# Altium PCB LedTutorial.PcbDoc
Units mm, origin at the board's own origin, x right, y up, seen from the top; angles counter-clockwise.
Board outline 20 x 20 mm, 2 copper layers (Top Layer, Bottom Layer), stack 1.671 mm thick; 3 components, 2 nets, 6 pads, 0 vias.
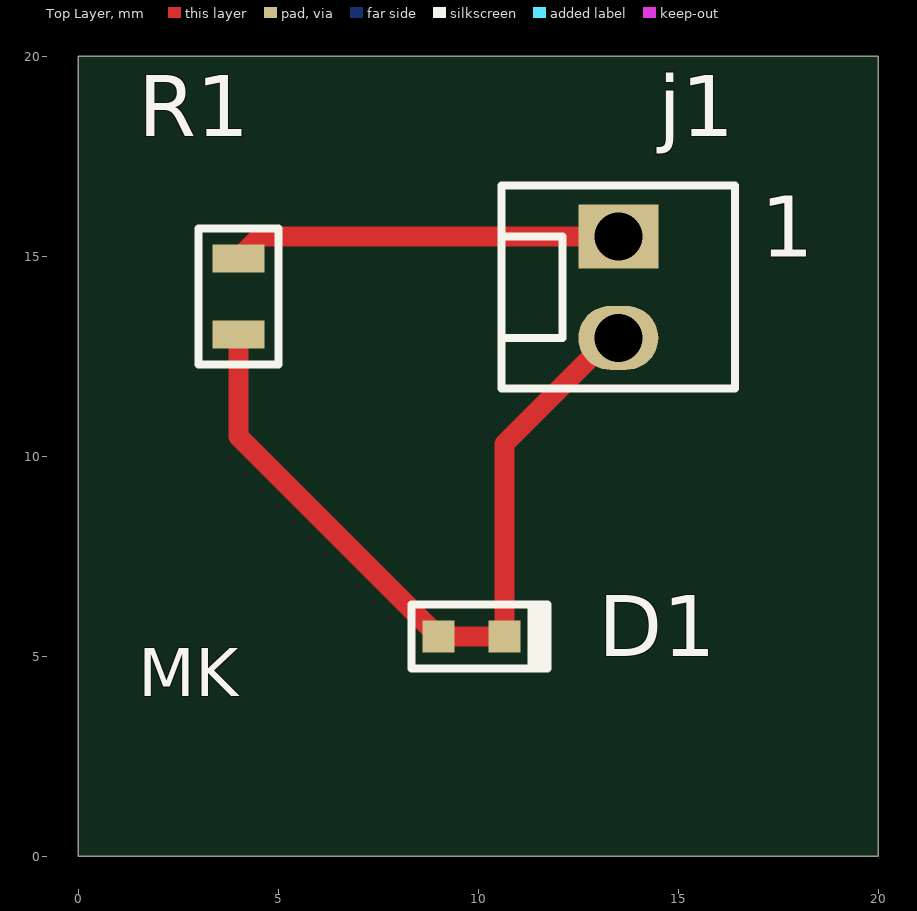
[diagram p0: Top Layer view]
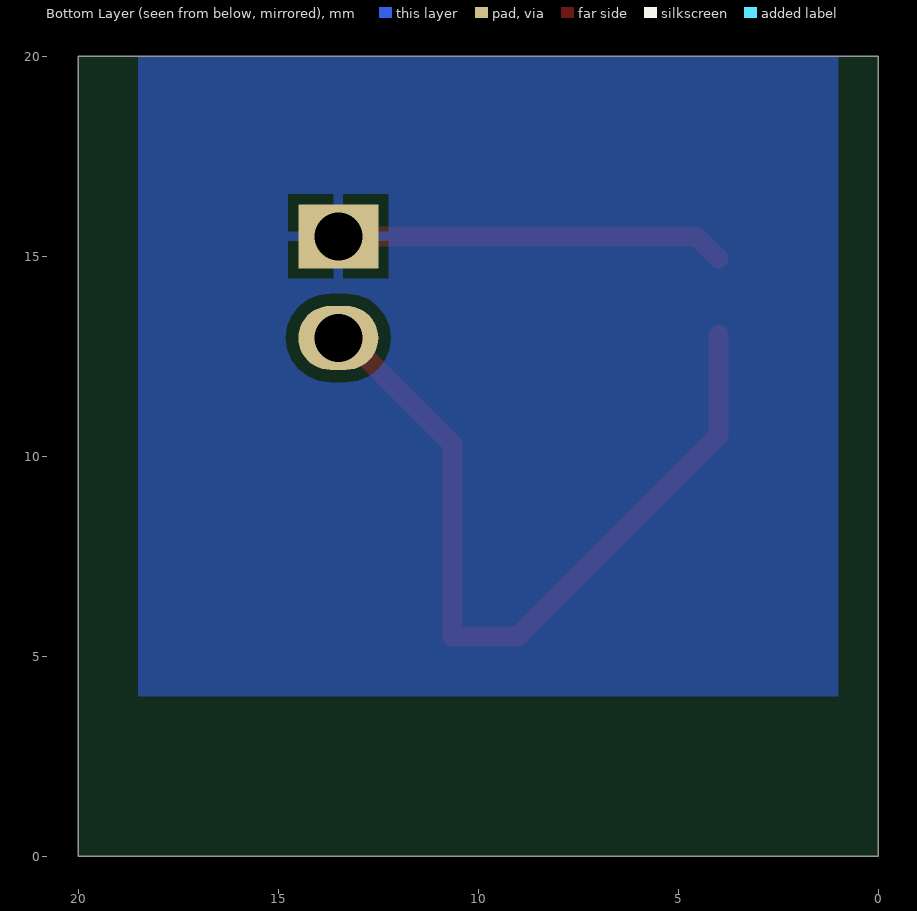
[diagram p1: Bottom Layer view, seen from below]
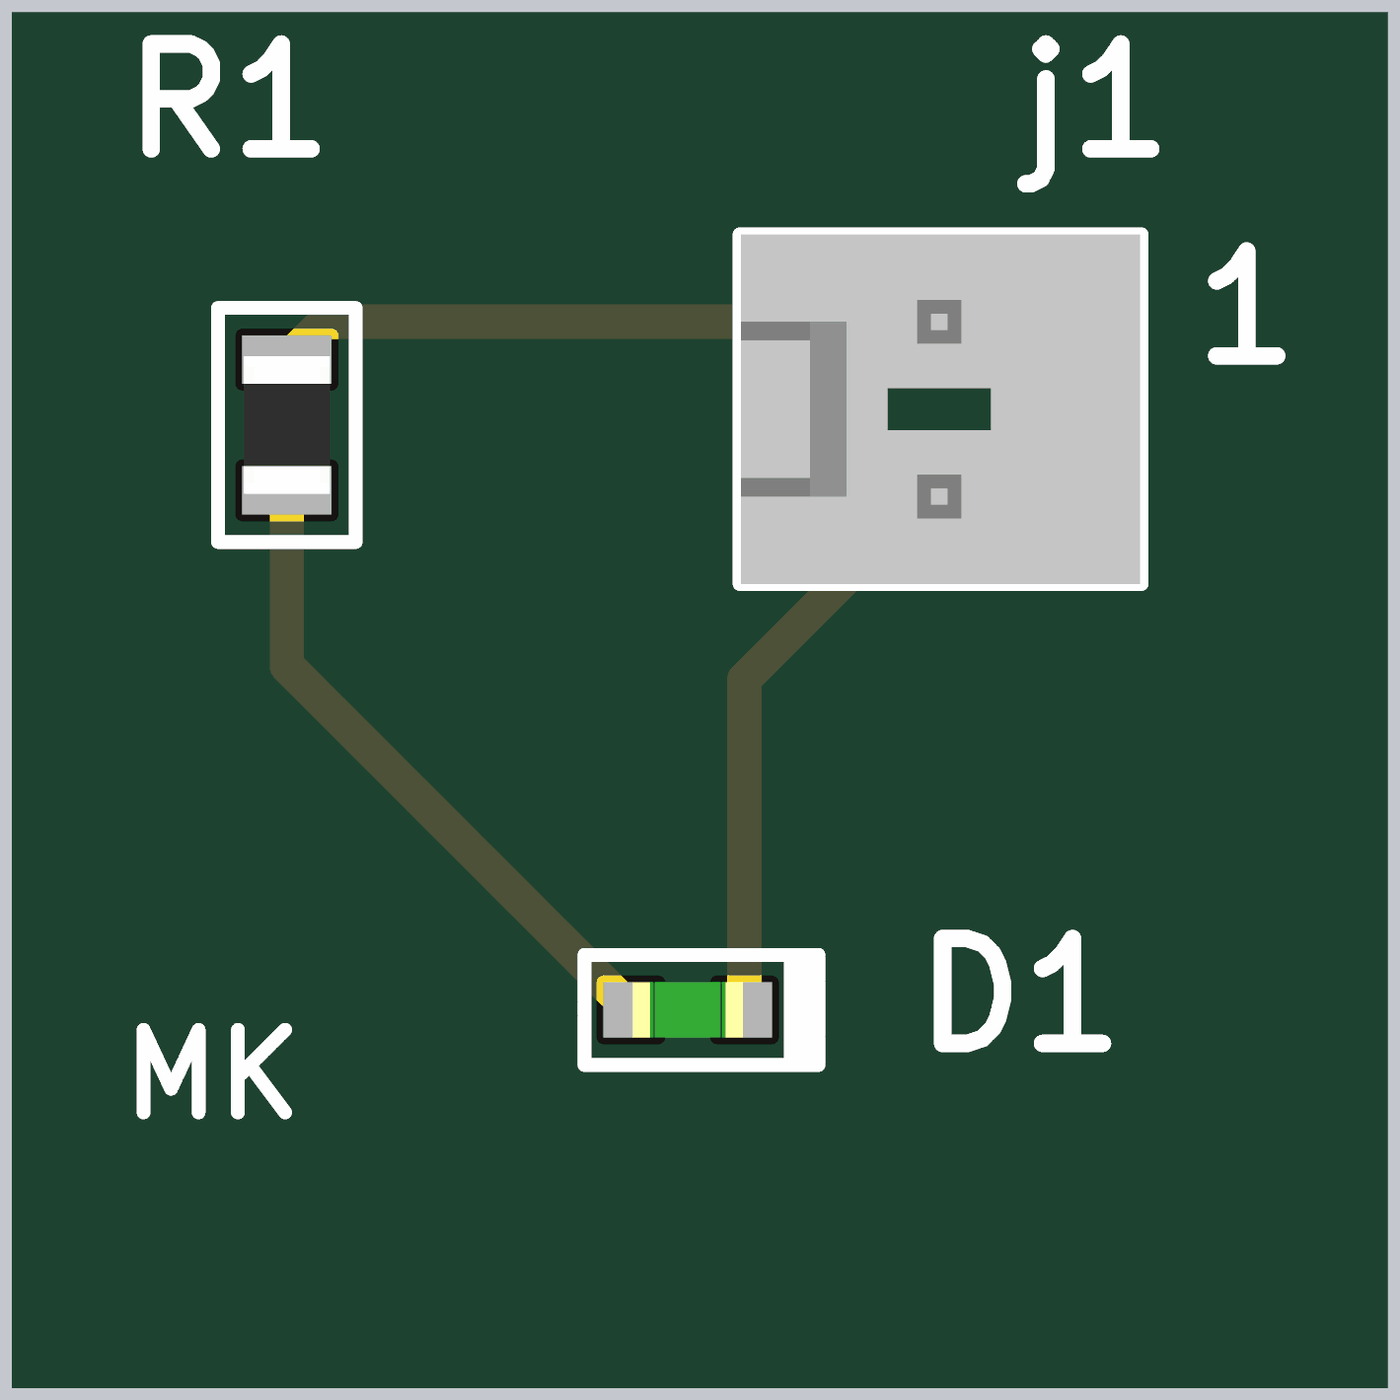
[diagram p2: 3D render of the assembled board from above, using the file's embedded part models]

## Layer stack, top to bottom
Top Solder: solder mask 0.0102, Solder Resist, Dk 3.5
Top Layer: signal copper 0.0356
Dielectric 1: dielectric 1.6, FR-4, Dk 4.8
Bottom Layer: signal copper 0.0356
Bottom Solder: solder mask 0.0102, Solder Resist, Dk 3.5

## Board outline
20,20 20,0 0,0 0,20

## Design rules (kind name [scope] priority, off if disabled: settings)
Clearance [All] p1: gap=0.3 ignorepadtopadclearanceinfootprint=FALSE
PolygonConnect [All] p1: connectstyle=Relief reliefconductorwidth=0.254 reliefentries=4 polygonreliefangle="90 Angle" airgapwidth=0.254
RoutingVias [All] p1: holewidth=0.3 width=0.6 viastyle="Through Hole" minholewidth=0.3 minwidth=0.6 maxholewidth=0.3 maxwidth=0.6
SolderMaskExpansion [All] p1: expansion=0.102
Width [All] p1: maxlimit=1 minlimit=0.3 preferedwidth=0.5
30 further rules are at their usual default settings.

## Components (designator, comment, footprint, x,y, rotation, side; value= is the part's Value field where it differs from the comment)
D1 "Green" LED0603G 9.825,5.5 r180 top
j1 "1x2 header" HDR1X2 13.5,15.5 r0 top
R1 "360R" R0805 4,14 r270 top

## Footprints (in the part's own frame and the unit in brackets; to place one, negate y for a bottom-side part, rotate by r counter-clockwise, add the part's x,y. Pads: shape width x height; smd on the part's side, far side on the other; paste and mask are expansions set on the pad)
HDR1X2 [mm]
  rect 2x1.6 / inner rect 2x1.2 / far side rect 2x1.6 hole 1.2: 1(0,0)
  oval 2x1.6 / inner oval 2x1.2 / far side oval 2x1.6 hole 1.2: 2(0,-2.54)
  silkscreen extent -2.92,-3.81 2.92,1.27, body extent -2.9,-3.81 2.9,1.27, height 11.71
LED0603G [mm]
  rect 0.8x0.8 smd: 1(-0.825,0) 2(0.825,0)
  silkscreen extent -1.9,-0.8 1.5,0.8, body extent -0.8,-0.4 0.8,0.4, height 0.4
R0805 [mm]
  rect 0.7x1.3 smd: 1(-0.95,0) 2(0.95,0)
  silkscreen extent -1.7,-1 1.7,1, body extent -1,-0.62 1,0.62, height 0.61

## Part data
D1: library part LNJ337W83RA, "LED GREEN ESS II SMD", Case/Package=0603, Case Code (Metric)=1608, Color=Green,Yellow, Forward Current=20mA, Forward Voltage=1.95V, Manufacturer 1="Panasonic SSG", Max Operating Temperature=85°C, Max Power Dissipation=55mW, Min Operating Temperature=-30°C, Package Quantity=1, Reverse Voltage=4V, Supplier Part Number 1=70368776, Test Current=5mA, Case Code (Imperial)=0603, Category=Optoelectronics, ComponentLink1Description=https://datasheet.ciiva.com/6868/lnj337w83ra-aek-6868817.pdf?src-supplier=Newark, ComponentLink1URL=https://datasheet.ciiva.com/6868/lnj337w83ra-aek-6868817.pdf?src-supplier=Newark, ComponentLink2Description=https://datasheet.ciiva.com/4690/lnj337w83ra-aek-226051-4690026.pdf?src-supplier=Mouser, ComponentLink2URL=https://datasheet.ciiva.com/4690/lnj337w83ra-aek-226051-4690026.pdf?src-supplier=Mouser, ComponentLink3Description=https://datasheet.ciiva.com/11775/0900766b80f0a8bb-11775418.pdf?src-supplier=RSComponents, ComponentLink3URL=https://datasheet.ciiva.com/11775/0900766b80f0a8bb-11775418.pdf?src-supplier=RSComponents, Dominant Wavelength=572nm, Height=0.2mm, Illumination Color=Green, Lead Free="Lead Free", Length=1.6mm, Lens Style=Rectangular, Luminous Intensity=7.5mcd, Manufacturer Part Number 1=LNJ337W83RA, Mount="Surface Mount", Number of LEDs=1, Number of Pins=2, Packaging="Tape and Reel", Pricing 1="5000=0.27500, 10000=0.25100, 15000=0.23100 (USD)", REACH SVHC=Yes, RoHS=Yes, Stock 1=0, Supplier 1="Allied Electronics", Wavelength=572nm, Width=0.8mm
j1: library part 22-29-2021, "Conn Wire to Board HDR 2 POS 2.54mm Solder ST Thru-Hole Bag", Color=White, Flammability Rating="UL94 V-0", Insulation Color=Natural, Manufacturer 1=Molex, Max Operating Temperature=80°C, Supplier Part Number 1=WM2744-ND, Voltage Rating (DC)=250V, Category=Connector, ComponentLink1Description=https://datasheet.ciiva.com/70131/022292021-sd-70131706.pdf?src-supplier=Digi-Key, ComponentLink1URL=https://datasheet.ciiva.com/70131/022292021-sd-70131706.pdf?src-supplier=Digi-Key, Connector Type="Header,Male Pin", Contact Material=Brass, Contact Mating Length=0.295inch, Contact Plating=Gold, Contact Post Length=0.14inch, Contact Shape=Square, Fastening Type=Friction, Gender=Male, Glow Wire Compliant=Non-compliant, Halogen Free="Low Halogen", Insulation Height=0.461inch, Insulation Material=Nylon, Lead Free="Lead Free", Manufacturer Part Number 1=22-29-2021, Mount="Through Hole", Number of Positions=2, Number of Rows=1, Packaging=Bag, Pricing 1="1=0.48000, 10=0.45200, 100=0.31630, 500=0.27112, 1000=0.22593, 5000=0.19365, 10000=0.18074 (USD)", RoHS=Yes, Stock 1=25229, Supplier 1=Digi-Key, Termination=Solder
R1: library part CRCW0805360RFKEA, "RES SMD 360 OHM 1% 1/8W 0805", Case/Package=0805, Case Code (Metric)=2012, Manufacturer 1=Vishay, Max Operating Temperature=155°C, Max Power Dissipation=125mW, Min Operating Temperature=-55°C, Package Quantity=10, Supplier Part Number 1=541-360CCT-ND, Temperature Coefficient=100ppm/°C, Tolerance=1%, Voltage Rating=150V, Case Code (Imperial)=0805, Category=Resistor, Cateogary=Resistor, ComponentLink1Description=https://datasheet.ciiva.com/11812/0900766b80d98b26-11812609.pdf?src-supplier=RSComponents, ComponentLink1URL=https://datasheet.ciiva.com/11812/0900766b80d98b26-11812609.pdf?src-supplier=RSComponents, ComponentLink2Description=https://datasheet.ciiva.com/7881/1697337-7881957.pdf?src-supplier=Element14, ComponentLink2URL=https://datasheet.ciiva.com/7881/1697337-7881957.pdf?src-supplier=Element14, ComponentLink3Description=https://datasheet.ciiva.com/7881/1697337-7881958.pdf?src-supplier=Element14, ComponentLink3URL=https://datasheet.ciiva.com/7881/1697337-7881958.pdf?src-supplier=Element14, ComponentLink4Description=https://datasheet.ciiva.com/8942/dcrcwe3-8942598.pdf?src-supplier=Avnet, ComponentLink4URL=https://datasheet.ciiva.com/8942/dcrcwe3-8942598.pdf?src-supplier=Avnet, ComponentLink5Description=https://datasheet.ciiva.com/22674/1847332-22674713.pdf?src-supplier=Element14, ComponentLink5URL=https://datasheet.ciiva.com/22674/1847332-22674713.pdf?src-supplier=Element14, ComponentLink6Description=https://datasheet.ciiva.com/2467/dcrcwe3-2467773.pdf?src-supplier=Digi-Key, ComponentLink6URL=https://datasheet.ciiva.com/2467/dcrcwe3-2467773.pdf?src-supplier=Digi-Key, ComponentLink7Description=https://datasheet.ciiva.com/2467/dcrcwe3-2467774.pdf?src-supplier=Digi-Key, ComponentLink7URL=https://datasheet.ciiva.com/2467/dcrcwe3-2467774.pdf?src-supplier=Digi-Key, ComponentLink8Description=https://datasheet.ciiva.com/5543/dcrcwe3-109170-5543710.pdf?src-supplier=Mouser, ComponentLink8URL=https://datasheet.ciiva.com/5543/dcrcwe3-109170-5543710.pdf?src-supplier=Mouser, ComponentLink9Description=https://datasheet.ciiva.com/2467/dcrcwe3-2467775.pdf?src-supplier=Digi-Key, ComponentLink9URL=https://datasheet.ciiva.com/2467/dcrcwe3-2467775.pdf?src-supplier=Digi-Key, Composition="Thick Film", Contact Plating=Tin, Depth=1.25mm, Features="Automotive AEC-Q200", Height=0.45mm, Lead Free="Lead Free", Length=2mm, Manufacturer Part Number 1=CRCW0805360RFKEA, Military Standard=Not, Number of Pins=2, Number of Terminations=2, Packaging="Tape and Reel", Power Rating=125mW, Pricing 1="1=0.10000, 10=0.06600, 100=0.02670, 1000=0.01199, 2500=0.01041 (USD)", Radiation Hardening=No, REACH SVHC=Unknown, Resistance=360R, RoHS=Yes, Stock 1=17529, Supplier 1=Digi-Key, Termination=SMD/SMT, Voltage Rating (DC)=150V, Weight=0.000194oz, Width=0.049inch

## Nets (pads, with @x,y where several pads share a name; then routed paths per layer and width w, separated by ;. In a path a pad name is that pad's centre, name@x,y a point inside that pad or via, vN(x,y) a via of type N, cw(c..) or ccw(c..) an arc to the next point about the centre after c; other vN are vias at no path point)
3.3V: D1.1 D1.2 j1.2 R1.2 | length 20
  Top Layer w0.5: R1.2 4,10.5 D1.2 D1.1 10.65,10.31 13.3,12.96 j1.2
Netj1_1: j1.1 R1.1 | length 9.7
  Top Layer w0.5: R1.1 4.55,15.5 j1.1

## Polygon pours and split planes (outlines as drawn)
Netj1_1 on Bottom Layer "Bottom Layer-Netj1_1" (solid, pour order 6): 23.5,15.5
Netj1_1 on Bottom Layer "Bottom Layer-Netj1_1 1" (solid, pour order 4): 1,20 1,4 18.5,4 18.5,20

## Silkscreen, mask and mechanical layers (free items; w line width, h text height)
Top Overlay:
  text "MK" at 1.5,4 h1.2
Board Outline:
  lines w0.1: 0,20 0,3 20,3 20,18

## Text inside footprints (layer, text, board x,y; h text height)
j1: Mechanical 29 "1" at 17.056,14.992 h1.52; Top Overlay "1" at 17.056,14.992 h1.52